# Altium PCB PCB1.PcbDoc
Units mil, origin at the board's own origin, x right, y up, seen from the top; angles counter-clockwise.
Board outline 2271.34 x 2271.34 mil, 2 copper layers (Top Layer, Bottom Layer), stack 60.4 mil thick; 13 components, 13 nets, 41 pads, 0 vias.
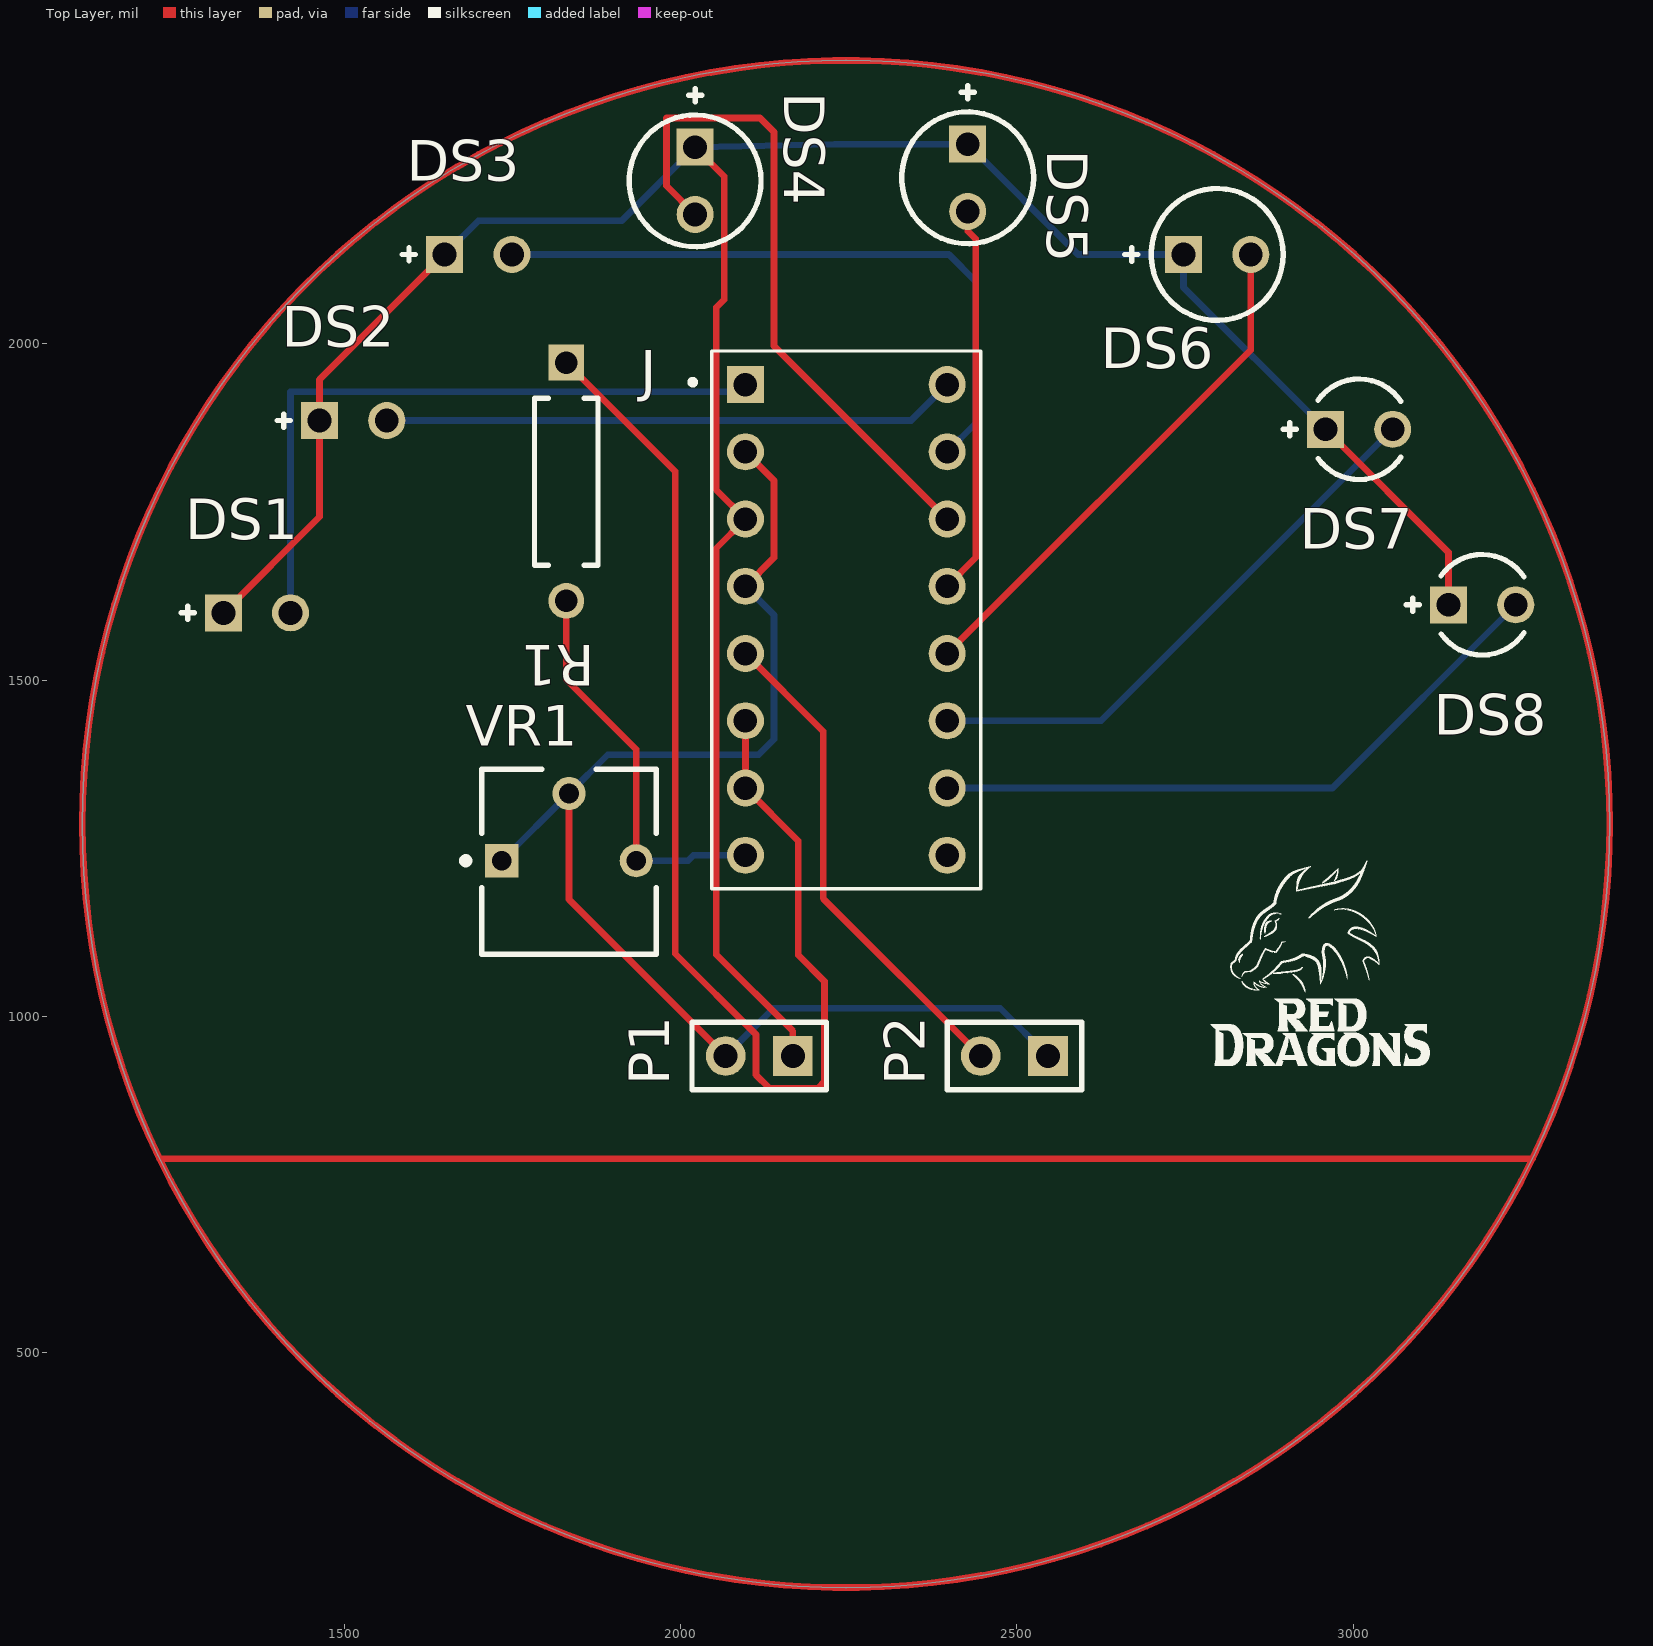
[diagram p0: Top Layer view]
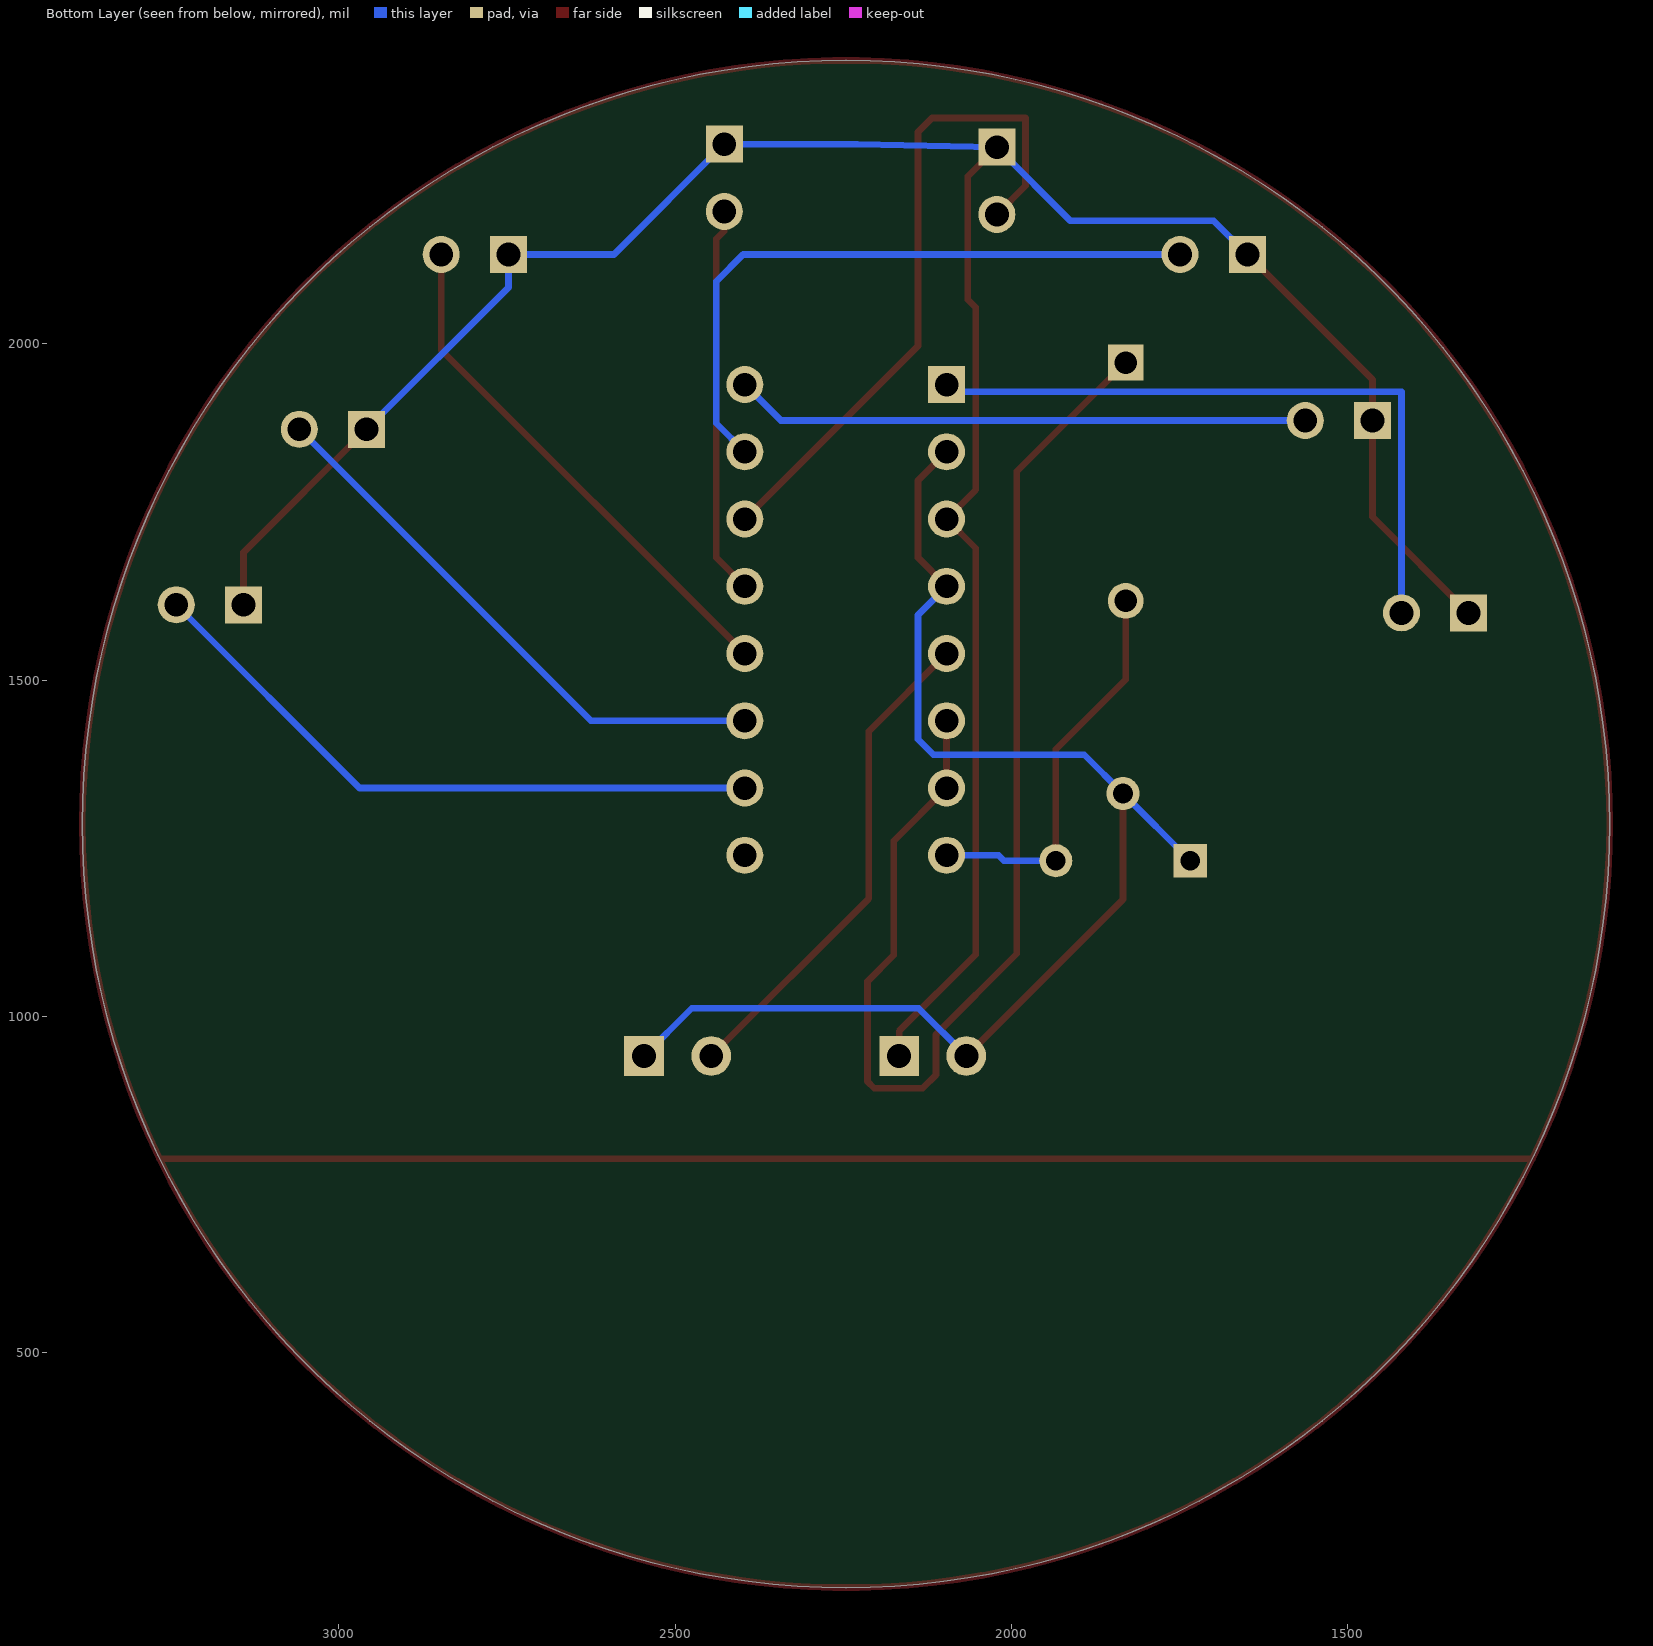
[diagram p1: Bottom Layer view, seen from below]

## Layer stack, top to bottom
Top Solder: solder mask 0.5, Solder Resist, Dk 3.3
Top Layer: signal copper 0.7
Dielectric1: core 59, FR-4, Dk 4.3
Bottom Layer: signal copper 0.7
Bottom Solder: solder mask 0.5, Solder Resist, Dk 3.3

## Board outline
1110.33,1286 ccw(c2246,1286) 2246,150.33 ccw(c2246,1286) 3381.67,1286 ccw(c2246,1286) 2246,2421.67 ccw(c2246,1286)

## Design rules (kind name [scope] priority, off if disabled: settings)
Clearance [All] p1: gap=10 ignorepadtopadclearanceinfootprint=FALSE
DiffPairsRouting [All] p1: maxlimit=10 minlimit=10 mostfreqgap=10 toplayer_minwidth=10 toplayer_maxwidth=10 toplayer_prefwidth=10 bottomlayer_minwidth=10 bottomlayer_maxwidth=10 bottomlayer_prefwidth=10 maxuncoupledlength=500
HoleSize [All] p1: absolutevalues=TRUE maxlimit=300 minlimit=10 maxpercent=80.000 minpercent=20.000
MinimumAnnularRing [All] p1: minimumring=10
PasteMaskExpansion [All] p1: expansion=10
PlaneClearance [All] p1: clearance=15
PlaneConnect [All] p1: pad.planeconnectstyle=Relief pad.reliefexpansion=20 pad.reliefentries=4 pad.reliefconductorwidth=10 pad.reliefairgap=10 via.planeconnectstyle=Direct via.reliefexpansion=20 via.reliefentries=4 via.reliefconductorwidth=10 via.reliefairgap=10
PolygonConnect [All] p1: thpad.connectstyle=Relief thpad.reliefconductorwidth=10 thpad.reliefentries=4 thpad.polygonreliefangle="90 Angle" thpad.airgapwidth=10 smdpad.connectstyle=Relief smdpad.reliefconductorwidth=10 smdpad.reliefentries=4 smdpad.polygonreliefangle="90 Angle" smdpad.airgapwidth=10 via.connectstyle=Direct via.reliefconductorwidth=10 via.reliefentries=4 via.polygonreliefangle="90 Angle" via.airgapwidth=10
RoomDefinition Sheet1 [InComponentClass('Sheet1')] p1: confinementstyle=ConfineIn formatcopy=TRUE lockcomponents=FALSE outline 533,2213.17 4056,2213.17 4056,3045.17 533,3045.17
RoutingVias [All] p1: holewidth=10 width=20 viastyle="Through Hole" minholewidth=10 minwidth=20 maxholewidth=10 maxwidth=20
SMDNeckDown [All] p1: percent=100.000
SilkToSolderMaskClearance SilkscreenOverComponentPads [IsPad] p1: minsilkscreentomaskgap=10 clearancetoexposedcopper=TRUE
SolderMaskExpansion [All] p1: expansion=10 istentingtop=FALSE
Width [All] p1: maxlimit=10 minlimit=10 preferedwidth=10
24 further rules are at their usual default settings.

## Components (designator, comment, footprint, x,y, rotation, side; value= is the part's Value field where it differs from the comment)
DS1 "LTL-1CHG" LTST-LTL-1CHG-2 1370,1600 r0 top
DS2 "LTL-1CHG" LTST-LTL-1CHG-2 1513,1886 r0 top
DS3 "LTL-1CHG" LTST-LTL-1CHG-2 1699.14,2133 r0 top
DS4 "LTL-1CHYE" LTST-LTL-1CHYE 2021.64,2242.5 r270 top
DS5 "LTL-1CHYE" LTST-LTL-1CHYE 2427,2247 r270 top
DS6 "LTL-1CHYE" LTST-LTL-1CHYE 2798,2133 r0 top
DS7 "LTL-1CHE" INDPR60-254-520X380X650 3009,1873 r0 top
DS8 "LTL-1CHE" INDPR60-254-520X380X650 3192,1612 r0 top
J "LM3915" TE_2-1571552-4 2246.44,1589.49 r0 top
P1 "Header 2" HDR1X2 2167,941 r180 top
P2 "Header 2" HDR1X2 2546.44,941 r180 top
R1 "MFR-25FBF52-1K" RESA60-630X240 1830,1795 r270 top value=1k
VR1 "3362P-1-103LF" BOUR-3362P 1834,1230 r0 top

## Footprints (in the part's own frame and the unit in brackets; to place one, negate y for a bottom-side part, rotate by r counter-clockwise, add the part's x,y. Pads: shape width x height; smd on the part's side, far side on the other; paste and mask are expansions set on the pad)
BOUR-3362P [mm] "THD, 3-Leads, Body 6.6x6.99mm, Pitch 2.54mm"
  rect 1.25x1.25 hole 0.75: 1(-2.54,0.035)
  round 1.25 hole 0.75: 2(0,2.575) 3(2.54,0.035)
  silkscreen extent -4.02,-3.5 3.3,3.5, body extent -3.3,-3.49 3.3,3.5, height 4.5
HDR1X2 [mm] "Connector; Header; 2 Position"
  rect 1.5x1.5 hole 0.9: 1(0,0)
  round 1.5 hole 0.9: 2(2.54,0)
  silkscreen extent -1.27,-1.27 3.81,1.27
INDPR60-254-520X380X650 [mm] "THD, 2-Leads, Dia 3.8mm, Pitch 2.54mm"
  rect 1.4x1.4 hole 0.9: 1(-1.27,0)
  round 1.4 hole 0.9: 2(1.27,0)
  silkscreen extent -2.87,-1.9 1.58,1.9, body extent -1.9,-1.9 1.9,1.9, height 6.5
LTST-LTL-1CHG-2 [mm] "TH, 2-Leads, Dia 3.8mm"
  rect 1.4x1.4 hole 0.9: 1(-1.27,0)
  round 1.4 hole 0.9: 2(1.27,0)
  silkscreen extent -2.87,-0.25 -2.37,0.25, body extent -1.9,-1.9 1.9,1.9, height 6.5
LTST-LTL-1CHYE [mm] "THD, 2-Leads, Dia 3.8mm, Pitch 2.54mm"
  rect 1.4x1.4 hole 0.9: 1(-1.27,0)
  round 1.4 hole 0.9: 2(1.27,0)
  silkscreen extent -3.49,-2.49 2.49,2.49, body extent -1.9,-1.9 1.9,1.9, height 6.5
RESA60-630X240 [mm] "Axial Resistor, 2-Leads, Dia 2.4mm, Body Length 6.3mm"
  rect 1.35x1.35 hole 0.85: 1(-4.5,0)
  round 1.35 hole 0.85: 2(4.5,0)
  silkscreen extent -3.15,-1.2 3.15,1.2, body extent -4.77,-1.19 4.77,1.2, height 2.4
TE_2-1571552-4 [mil]
  rect 55x55 hole 35: 1(-150,350)
  round 55 hole 35: 2(-150,250) 3(-150,150) 4(-150,50) 5(-150,-50) 6(-150,-150) 7(-150,-250) 8(-150,-350) 9(150,-350) 10(150,-250) 11(150,-150) 12(150,-50) 13(150,50) 14(150,150) 15(150,250) 16(150,350)
  silkscreen extent -232,-400 200,400

## Part data
DS1 DS2 DS3: library part CMP-007-00019-2, "LED Uni-Color Green, 100 mW, 30 mA, -55 to 100 degC, 2-Pin THD, RoHS, Bulk", Case/Package=Radial, Colour=Green, Forward Current=30mA, Forward Voltage=2.6V, Manufacturer=Lite-On, Max Operating Temperature=100°C, Min Operating Temperature=-55°C, Package Description="2-Pin Through Hole Device, Dia 3.8 mm", Package Quantity=1000, Power=100mW, Datasheet URL=http://datasheet.octopart.com/LTL-1CHG-Lite-On-datasheet-143841.pdf, Datasheet Version=Mar-00, Illumination Colour=Green, Lens Style=Dome, Luminous Intensity=12.6mcd, Manufacturer URL=http://www.us.liteon.com/, Mounting Technology=TH, Nominal Vf=2.1V, Package Reference=LTL-1CHG, Packaging=Bulk, Pins=2, RoHS Compliant=True, Viewing Angle=60degrees
DS4 DS5 DS6: library part CMP-007-00020-2, "LED Uni-Color Yellow, 60 mW, 20 mA, -55 to 100 degC, 2-Pin THD, RoHS, Bulk", Case/Package=Radial, Colour=Yellow, Forward Current=20mA, Forward Voltage=2.1V, Manufacturer=Lite-On, Max Operating Temperature=100°C, Min Operating Temperature=-55°C, Package Description="2-Pin Through Hole Device, Dia 3.8 mm, Pitch 2.54 mm", Package Quantity=1000, Datasheet URL=https://datasheet.ciiva.com/4269/s-110-ltl-1chye-4269126.pdf, Datasheet Version="Rev. B, 07/2013", Illumination Colour=Yellow, Lens Style=Dome, Luminous Intensity=40mcd, Manufacturer URL=http://www.us.liteon.com/, Mounting Technology=TH, Nominal Vf=2.1V, Package Reference=LTL-1CHYE, Packaging=Bulk, Pins=2, RoHS Compliant=True, Viewing Angle=45degrees
DS7 DS8: library part CMP-007-00018-2, "LED Uni-Color Red, 100 mW, 30 mA, -55 to 100 degC, 2-Pin THD, RoHS, Bulk", Case/Package=Radial, Colour=Red, Forward Current=20mA, Forward Voltage=2V, Manufacturer=Lite-On, Max Operating Temperature=100°C, Min Operating Temperature=-55°C, Package Description="2-Pin Through Hole Device, Dia 3.8 mm, Pitch 2.54 mm", Package Quantity=1000, Datasheet URL=https://datasheet.ciiva.com/15117/getdatasheetpartid-187746-15117985.pdf, Datasheet Version=Dec-03, Illumination Colour=Red, Lens Style=Dome, Luminous Intensity=12.6mcd, Manufacturer URL=http://www.us.liteon.com/, Mounting Technology=TH, Nominal Vf=2V, Package Reference=LTL-1CHE, Packaging=Bulk, Pins=2, RoHS Compliant=True, Viewing Angle=60degrees
J: library part 2-1571552-4, "16 (2 x 8) Pos DIP, 0.3 (7.62mm) Row Spacing Socket Gold Through Hole", Contact_Current_Rating_Max="3 A", Package=None, Availability=Warning, EU_RoHS_Compliance="Compliant with Exemptions", MF="TE Connectivity", Mouser-Purchase-URL=https://snapeda.com/shop?store=Mouser&id=454027, MP=2-1571552-4, Price=None, Product_Type=Socket, SnapEDA_Link=https://www.snapeda.com/parts/2-1571552-4/TE%20Connectivity%20AMP%20Connectors/view-part/454027/?ref=snap
P1 P2: "Header, 2-Pin", LatestRevisionDate=17-Jul-2002, LatestRevisionNote="Re-released for DXP Platform.", Publisher="Altium Limited"
R1: library part CMP-009-00048-4, "Axial Resistor, 1 KOhm, +/- 1%, 250 mW, -55 to 155 degC, 2-Pin THD, RoHS, Bulk", Case/Package=Axial, Manufacturer=Yageo, Max Operating Temperature=155°C, Min Operating Temperature=-55°C, Package Description="2-Pin Axial Lead, Dia 2.4 mm, Body Length 6.3 mm", Package Quantity=200, Package Reference=MFR-25, Power=250mW, Tolerance=1%, Voltage Rating=250V, Composition=CarbonFilm, Datasheet URL=http://www.yageo.com/documents/recent/Yageo%20LR_MFR_2013.pdf, Datasheet Version=Apr-13, Manufacturer URL=http://www.yageo.com/, Mounting Technology=TH, Packaging=Bulk, RoHS Compliant=True
VR1: library part CMP-009-00039-2, "Square Trimpot(R) Trimming Potentiometer, 10 KOhm, 300 V, -55 to 125 degC, 3-Pin THD, RoHS, Tube", Case/Package=3326P, Manufacturer=Bourns, Max Operating Temperature=125°C, Min Operating Temperature=-55°C, Package Description="3-Pin Through Hole Device, Body 6.6 x 6.99 mm, Pitch 2.54 mm", Package Quantity=250, Power=500mW, Resistance=10k, Tolerance=10%, Voltage Rating=300V, Composition=Potentiometer, Datasheet URL=http://www.bourns.com/docs/Product-Datasheets/3362.pdf, Datasheet Version=May-16, Lead Pitch=2.54mm, Manufacturer URL=http://www.bourns.com/, Mounting Technology=TH, Package Reference=3326P, Packaging=Rail/Tube, Pins=3, RoHS Compliant=True

## Nets (pads, with @x,y where several pads share a name; then routed paths per layer and width w, separated by ;. In a path a pad name is that pad's centre, name@x,y a point inside that pad or via, vN(x,y) a via of type N, cw(c..) or ccw(c..) an arc to the next point about the centre after c; other vN are vias at no path point)
+12: DS1.1 DS2.1 DS3.1 DS4.1 DS5.1 DS6.1 DS7.1 DS8.1 J.3 P1.1 | length 4044.1
  Top Layer w10: DS1.1 1463,1743 DS2.1 1463,1946.86 DS3.1 ; DS4.1 2065,2249.14 2065,2066 2053,2054 2053,1782.93 J.3 2053,1696.05 2053,1091.89 2167,977.89 P1.1 ; DS7.1 3142,1690 DS8.1
  Bottom Layer w10: DS3.1 1699.14,2183 1912.14,2183 DS4.1 2229.5,2297 DS5.1 2591,2133 DS6.1 2748,2084 DS7.1
GND: J.2 J.4 P1.2 P2.1 VR1.1 VR1.2 | length 1985.3
  Top Layer w10: VR1.2 1834,1174 P1.2 ; J.4 2139,1682.05 2139,1796.93 J.2
  Bottom Layer w10: VR1.1 VR1.2 1891.62,1389 2116,1389 2139,1412 2139,1596.93 J.4 ; P1.2 2138,1012 2475.44,1012 P2.1
NetDS1_2: DS1.2 J.1 | length 1015.9
  Bottom Layer w10: DS1.2 1420,1929 2096.44,1929 J.1
NetDS2_2: DS2.2 J.16 | length 855.6
  Bottom Layer w10: DS2.2 2342.95,1886 J.16
NetDS3_2: DS3.2 J.15 | length 977.6
  Bottom Layer w10: DS3.2 2399,2133 2439,2093 2439,1882.05 J.15
NetDS4_2: DS4.2 J.14 | length 1012
  Top Layer w10: DS4.2 1979,2235.14 1979,2336 2118,2336 2139,2315 2139,1996.93 J.14
NetDS5_2: DS5.2 J.13 | length 580.1
  Top Layer w10: J.13 2439,1682.05 2439,2156 2427,2168 DS5.2
NetDS6_2: DS6.2 J.12 | length 780.6
  Top Layer w10: J.12 2848,1991.05 DS6.2
NetDS7_2: DS7.2 J.11 | length 842.1
  Bottom Layer w10: J.11 2625.49,1439.49 DS7.2
NetDS8_2: DS8.2 J.10 | length 958.4
  Bottom Layer w10: J.10 2969.49,1339.49 DS8.2
NetJ_5: J.5 P2.2 | length 743.5
  Top Layer w10: J.5 2212,1423.93 2212,1175.44 P2.2
NetJ_6: J.6 J.7 R1.1 | length 1875.6
  Top Layer w10: R1.1 1992,1810.17 1992,1093 2112,973 2112,913 2132,893 2204,893 2214,903 2214,1052 2175,1091 2175,1260.93 J.7 J.6
NetJ_8: J.8 R1.2 VR1.3 | length 595.3
  Top Layer w10: R1.2 1830,1501 1934,1397 VR1.3
  Bottom Layer w10: VR1.3 2011,1231.38 2019.11,1239.49 J.8
pads on no net: J.9
copper on no net: | length 9174.7
  Top Layer w10: 1227.75,788.3 3266.8,788.3 ; 3381.67,1286 ccw(c2246,1286) 3381.67,1286

## Silkscreen, mask and mechanical layers (free items; w line width, h text height)
Top Overlay:
  drawing of 22 lines, arcs and shapes, not listed